# Altium PCB LM399.PcbDoc
Units mil, origin at the board's own origin, x right, y up, seen from the top; angles counter-clockwise.
Board outline 3252 x 1988.19 mil, 4 copper layers (Top Layer, Layer 1, Layer 2, Bottom Layer), stack 62.493 mil thick; 66 components, 27 nets, 222 pads, 268 vias.
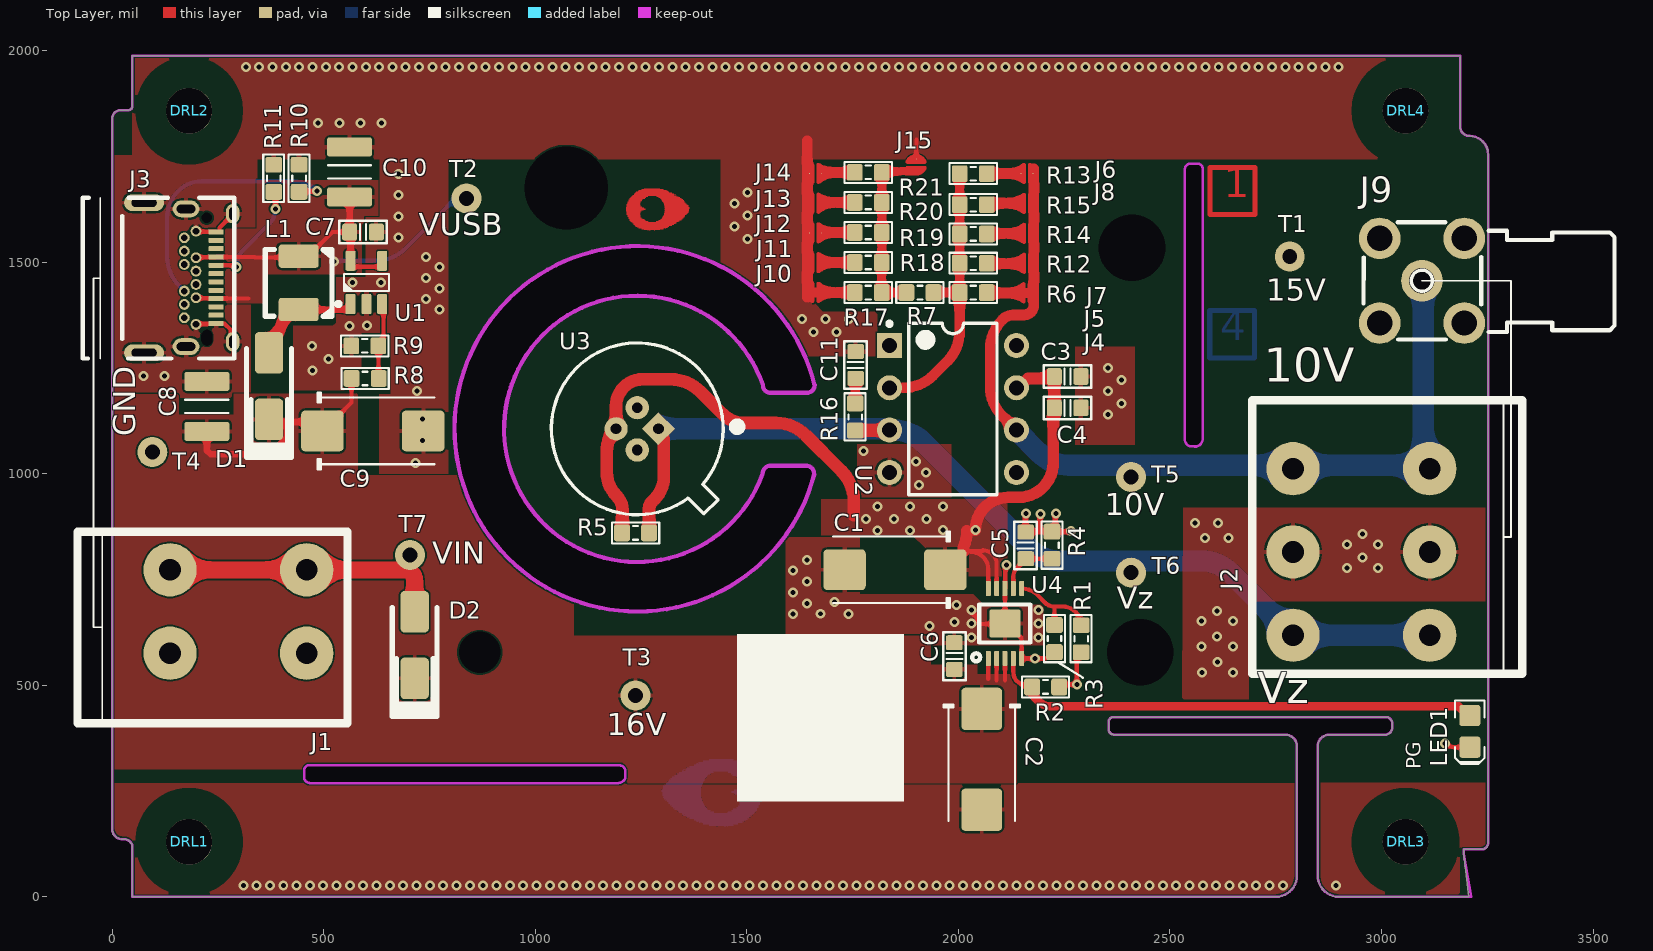
[diagram p0: Top Layer view]
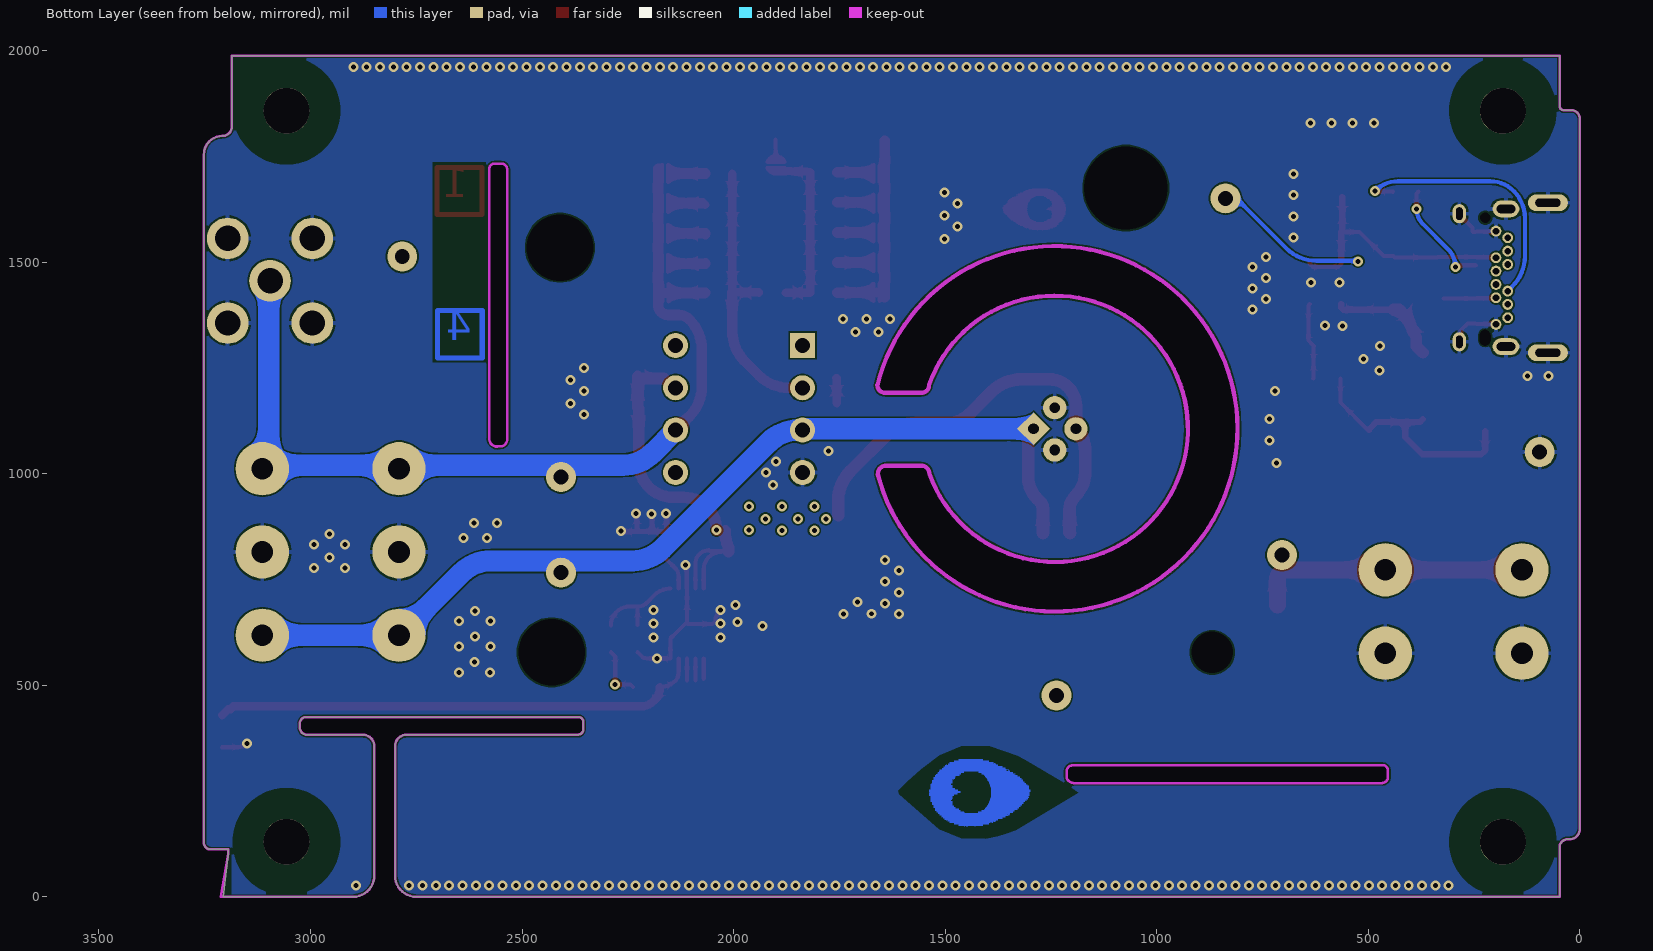
[diagram p1: Bottom Layer view, seen from below]
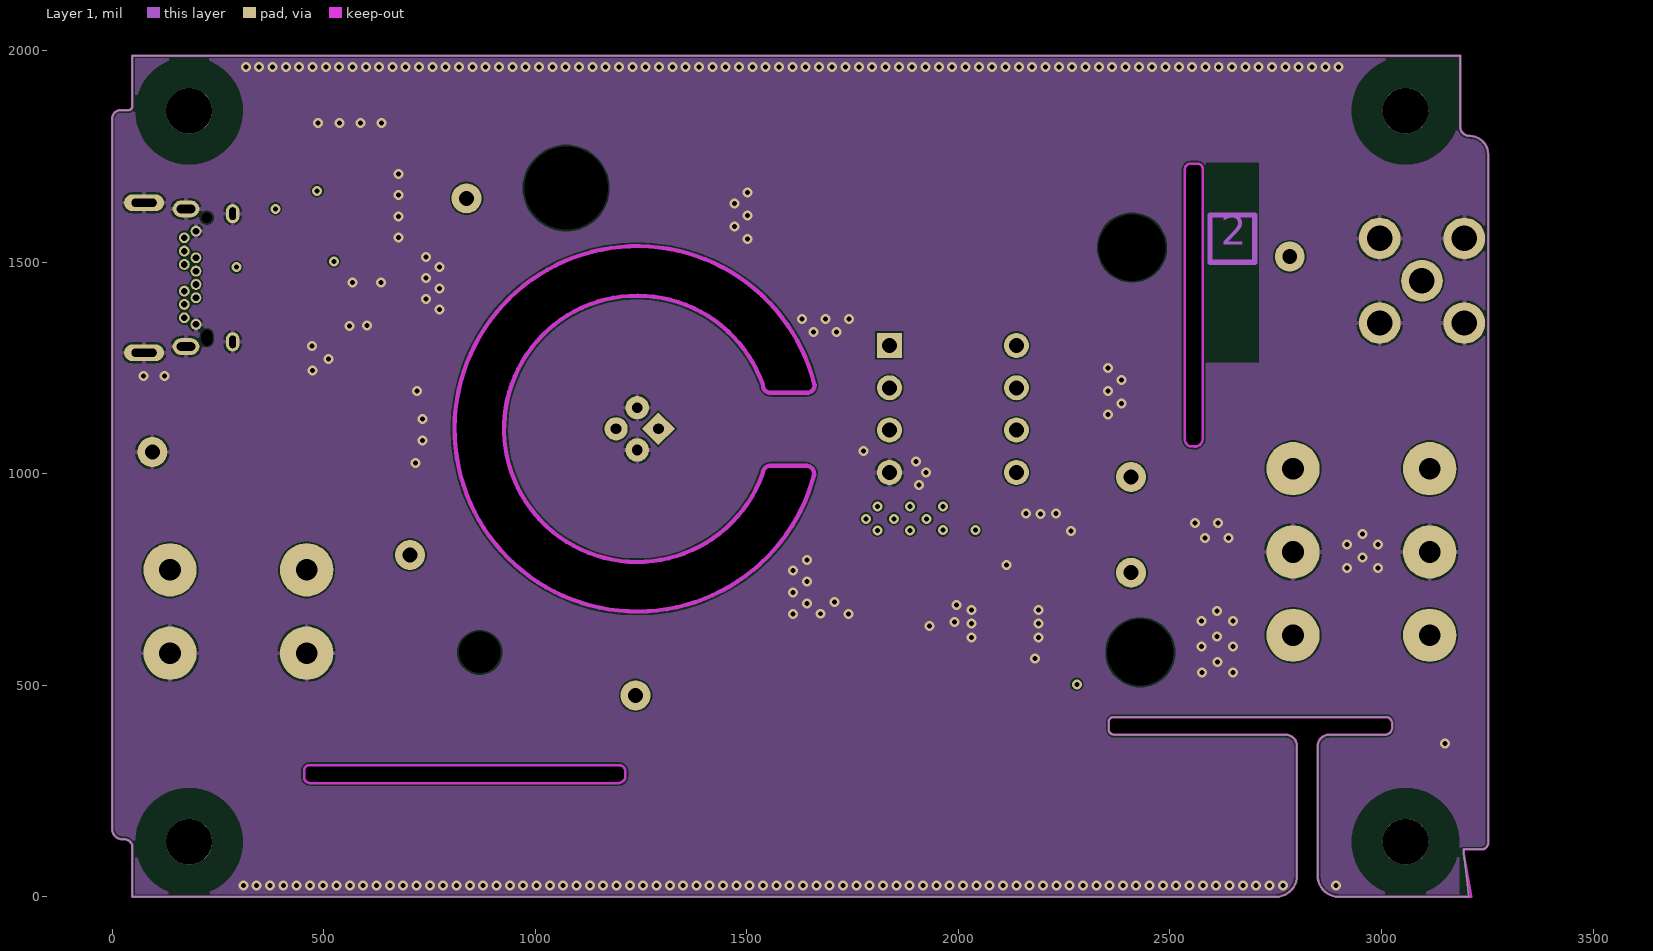
[diagram p2: Layer 1]
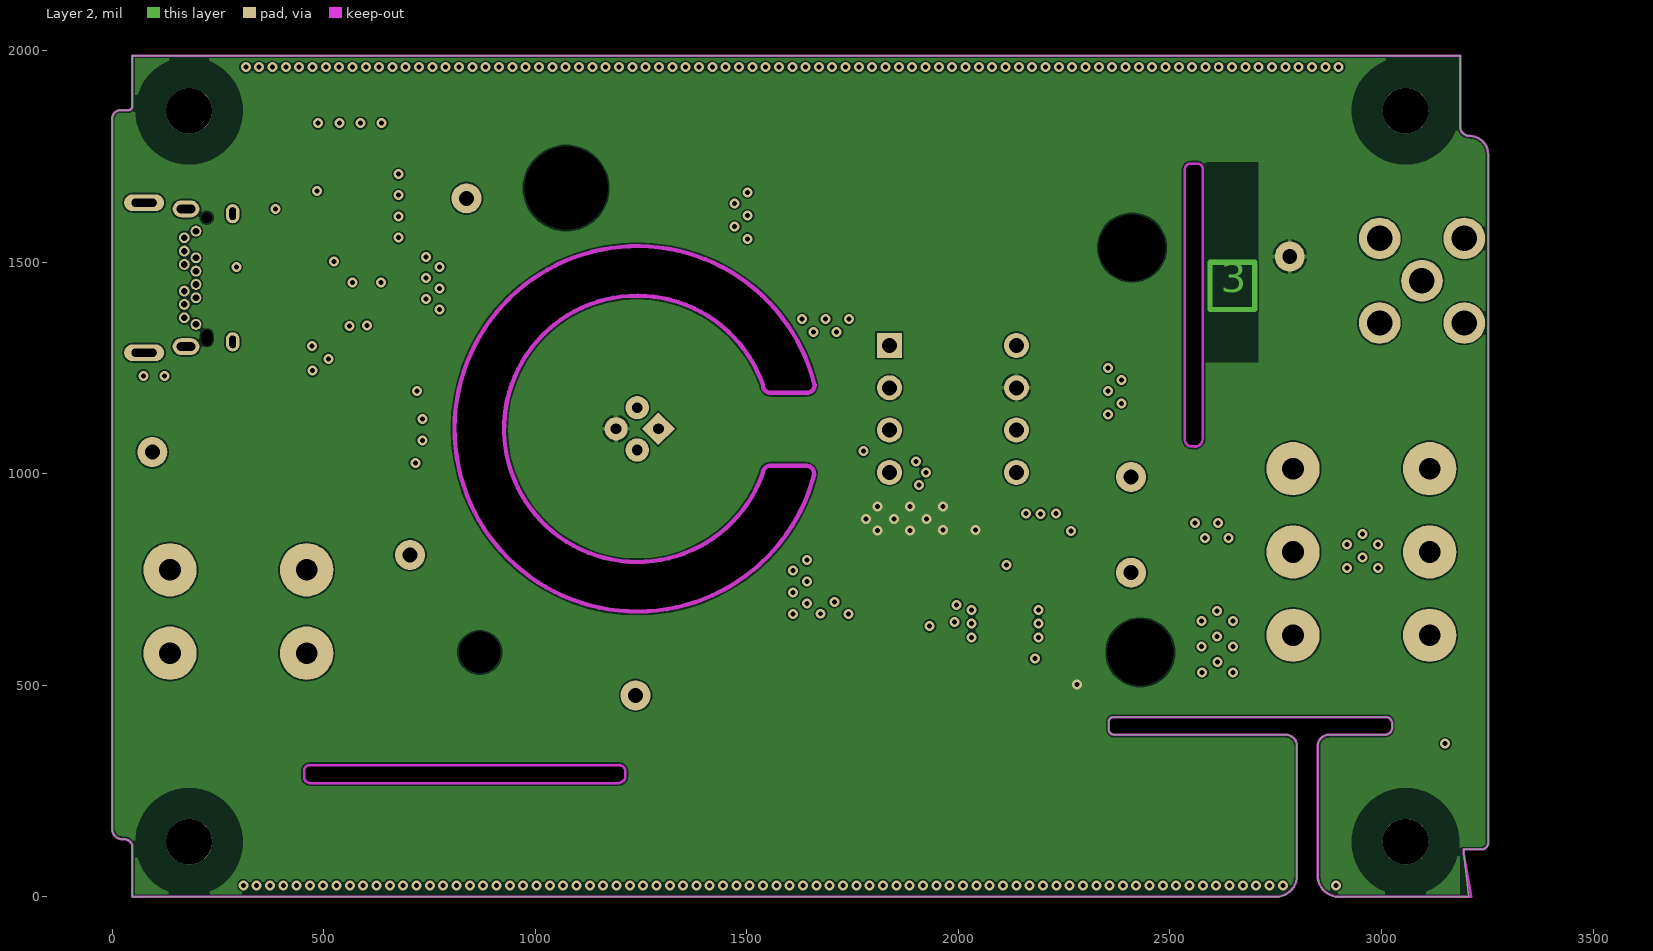
[diagram p3: Layer 2]
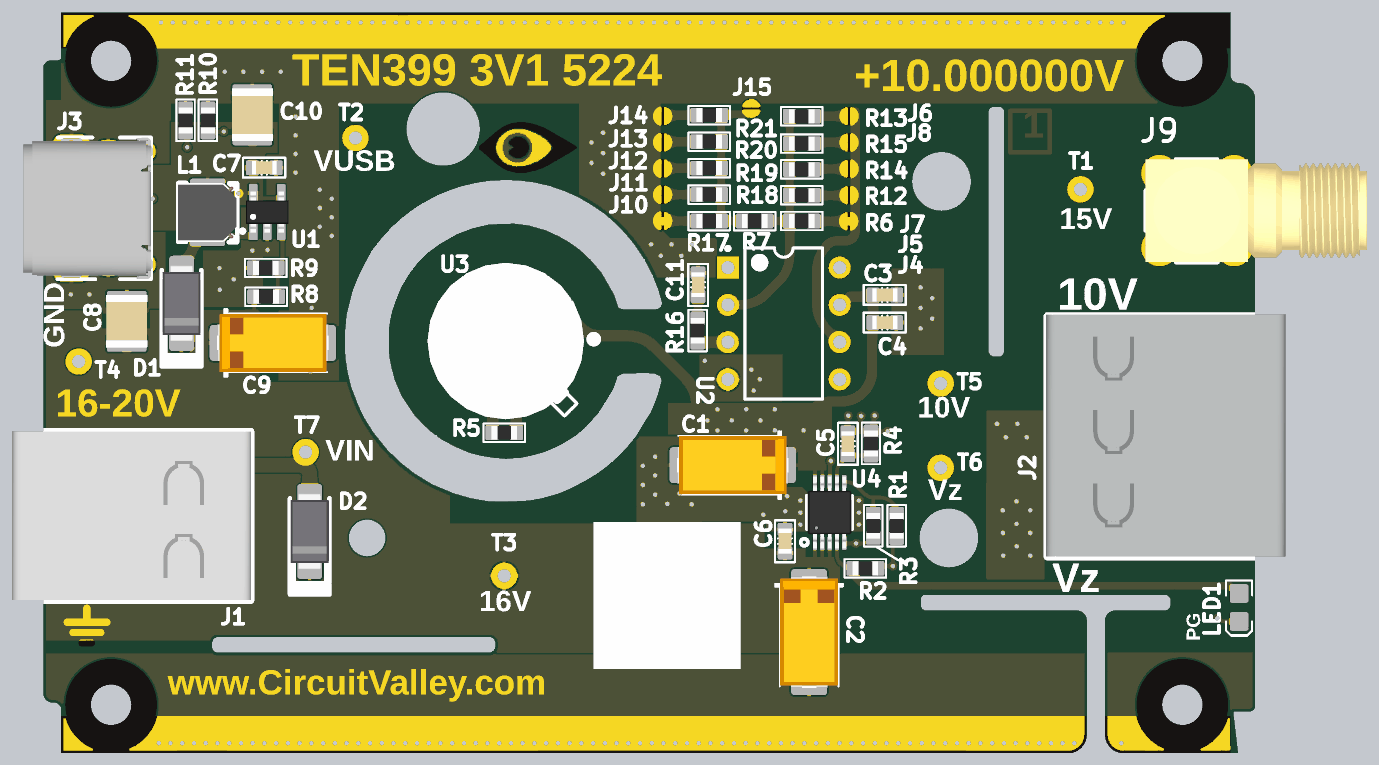
[diagram p4: 3D render of the assembled board from above, using the file's embedded part models]

## Layer stack, top to bottom
Top Solder: solder mask 0.4, Solder Resist, Dk 3.5
Top Layer: signal copper 1.4
Dielectric 2: prepreg 8.2835, PP-006, Dk 4.1
Layer 1: signal copper 0.5984
Dielectric 1: dielectric 41.9291, FR-4, Dk 4.8
Layer 2: signal copper 0.5984
Dielectric 3: prepreg 8.2835, PP-006, Dk 4.1
Bottom Layer: signal copper 1.4
Bottom Solder: solder mask 0.4, Solder Resist, Dk 3.5

## Board outline
25,136 29,136 cw(c29,117) 48,117 48,0 2750,0 ccw(c2750,50) 2800,50 2800,356 ccw(c2773,356) 2773,383 2368.66,383 cw(c2368.66,396.66) 2355,396.66 2355,413.1 cw(c2366.9,413.1) 2366.9,425 3009.93,425 cw(c3009.93,410) 3024.93,410 3024.93,399.93 cw(c3008,399.93) 3008,383 2876,383 ccw(c2876,356) 2849,356 2849,50 ccw(c2899,50) 2899,0 3206,0 3194,102 3194,112 3236,112 ccw(c3236,128) 3252,128 3252,1754 ccw(c3208,1754) 3208,1798 cw(c3208,1820.2) 3185.8,1820.2 3185.8,1988.19 48,1988.19 48,1868.63 cw(c38.37,1868.63) 38.37,1859 20,1859 ccw(c20,1839) 0,1839 0,161 ccw(c25,161)
cut-out: 1556,1191 1641.93,1191 ccw(c1641.93,1209.3) 1660.23,1209.3 1650,1245 1634,1285 1622,1309 1604,1339 1587,1364 1566,1390 1541,1417 1507,1447 1478,1467 1438,1491 1400,1508 1360,1522 1316,1532 1276,1537 1239,1538 1197,1536 1163,1531 1124,1522 1094,1512 1064,1500 1038,1487 1011,1472 986,1455 963,1437 935,1412 906,1380 881,1348 859,1307 844,1276 830,1241 814,1178 810,1134 809,1092 811,1058 817,1020 826,983 846,931 862,898 886,860 923,814 957,781 995,751 1044,721 1102,697 1147,684 1194,676 1226,675 1269,676 1304,678 1338,684 1384,697 1414,710 1451,729 1486,750 1513,770 1545,798 1568,823 1591,851 1613,888 1630,914 1642,943 1650,965 1659.28,998.93 1655,1012 1639.21,1019 1617,1020 1556.53,1019 1541,1012 1537.12,999.6 1530,979 1511,947 1488,911 1454,874 1431,854 1401,835 1379,823 1347,809 1315,800 1283,793 1241,790 1207,793 1176,798 1144,806 1111,820 1070,841 1039,864 1020,882 997,906 978,934 962,958 943,1002 935,1033 929,1063 926,1101 927,1130 930,1156 936,1185 947,1217 961,1251 982,1286 1002,1312 1035,1345 1064,1366 1109,1392 1151,1408 1193,1418 1228,1420 1263,1421 1302,1416 1348,1403 1383,1387 1411,1371 1439,1351 1468,1324 1497,1290 1514,1261 1532,1229 1538.06,1209.77 1543,1195
cut-out: 2536,1081 ccw(c2553,1081) 2553,1064 2563.83,1064 ccw(c2563.83,1077.59) 2577.41,1077.59 ccw(c2576,1079) 2578,1079 2578,1722.1 ccw(c2566.1,1722.1) 2566.1,1734 2549.66,1734 ccw(c2549.66,1720.34) 2536,1720.34
cut-out: 1196.37,312 cw(c1196.37,295.19) 1213.18,295.19 1213.18,288.21 cw(c1194.64,288.21) 1194.64,269.67 1010.1,270 468,270 cw(c468,285) 453,285 453,295.07 cw(c469.93,295.07) 469.93,312

## Design rules (kind name [scope] priority, off if disabled: settings)
Clearance Clearance_GNDT [OnLayer('GND_T')] p1: gap=5 ignorepadtopadclearanceinfootprint=FALSE
Clearance Clearance_INT [OnLayer('Signal_INT')] p2: gap=5 ignorepadtopadclearanceinfootprint=FALSE
Clearance [All] p3: gap=3.62 ignorepadtopadclearanceinfootprint=FALSE
Clearance Clearance_PWR [OnLayer('PWR')] p4: gap=5 ignorepadtopadclearanceinfootprint=FALSE
Clearance Clearance_GNDB [OnLayer('GND_B')] p5: gap=5 ignorepadtopadclearanceinfootprint=FALSE
ComponentClearance [All] p1: gap=10 collisioncheckmode=3 verticalgap=0 showdistances=FALSE
DiffPairsRouting [All] p1: maxlimit=4 minlimit=4 mostfreqgap=4 toplayer_minwidth=4.62 toplayer_maxwidth=10 toplayer_prefwidth=4.62 midlayer1_minwidth=4.62 midlayer1_maxwidth=10 midlayer1_prefwidth=4.62 midlayer2_minwidth=4.62 midlayer2_maxwidth=10 midlayer2_prefwidth=4.62 bottomlayer_minwidth=4.62 bottomlayer_maxwidth=10 bottomlayer_prefwidth=4.62 maxuncoupledlength=500
HoleSize [All] p1: absolutevalues=TRUE maxlimit=196.85 minlimit=1 maxpercent=80.000 minpercent=20.000
MatchedLengths Matched_MIPI_GRP [InNetClass('MIPI')] p1: tolerance=5 checknetsindiffpair=FALSE checkdiffpairvsdiffpair=TRUE checkxsignals=TRUE checkothers=TRUE
MatchedLengths Matched_MIPI [InNetClass('MIPI')] p2: tolerance=5 checknetsindiffpair=TRUE checkdiffpairvsdiffpair=FALSE checkxsignals=FALSE checkothers=FALSE
MatchedLengths Matched_GPIF_GRP [InNetClass('GPIF')] p3: tolerance=50 checknetsindiffpair=FALSE checkdiffpairvsdiffpair=TRUE checkxsignals=TRUE checkothers=TRUE
MatchedLengths Matched_USB3FX_GRP [InNetClass('USB3FX')] p4: tolerance=5 checknetsindiffpair=FALSE checkdiffpairvsdiffpair=TRUE checkxsignals=TRUE checkothers=TRUE
MatchedLengths Match_USB3FX [InNetClass('USB3FX')] p5: tolerance=4 checknetsindiffpair=TRUE checkdiffpairvsdiffpair=FALSE checkxsignals=FALSE checkothers=FALSE
MatchedLengths Matched_USB3_GRP [InNetClass('USB3')] p6: tolerance=10 checknetsindiffpair=FALSE checkdiffpairvsdiffpair=TRUE checkxsignals=TRUE checkothers=TRUE
MatchedLengths Matched_USB2 [InNetClass('USB2')] p7: tolerance=40 checknetsindiffpair=TRUE checkdiffpairvsdiffpair=FALSE checkxsignals=FALSE checkothers=FALSE
MatchedLengths Matched_USB3 [InNetClass('USB3')] p8: tolerance=4 checknetsindiffpair=TRUE checkdiffpairvsdiffpair=FALSE checkxsignals=FALSE checkothers=FALSE
MinimumSolderMaskSliver [All] p1: minsoldermaskwidth=0.02
PlaneClearance [All] p1: clearance=6
PlaneConnect PlaneConnect_1 [All] p1: pad.planeconnectstyle=Relief pad.reliefexpansion=20 pad.reliefentries=4 pad.reliefconductorwidth=10 pad.reliefairgap=5 via.planeconnectstyle=Direct via.reliefexpansion=20 via.reliefentries=4 via.reliefconductorwidth=10 via.reliefairgap=10
PolygonConnect [All] p1: thpad.connectstyle=Relief thpad.reliefconductorwidth=10 thpad.reliefentries=4 thpad.polygonreliefangle="90 Angle" thpad.airgapwidth=5 smdpad.connectstyle=Relief smdpad.reliefconductorwidth=10 smdpad.reliefentries=4 smdpad.polygonreliefangle="90 Angle" smdpad.airgapwidth=5 via.connectstyle=Direct via.reliefconductorwidth=10 via.reliefentries=4 via.polygonreliefangle="90 Angle" via.airgapwidth=10
RoutingVias [All] p1: holewidth=7.87 width=17.72 viastyle="Through Hole" minholewidth=7.87 minwidth=17.72 maxholewidth=248.03 maxwidth=275.59
SilkToSilkClearance [All] p1: silktosilkclearance=0
SilkToSolderMaskClearance [IsPad] p1: minsilkscreentomaskgap=0 clearancetoexposedcopper=TRUE
SolderMaskExpansion [All] p1: expansion=1 istentingtop=FALSE
Width [All] p1: maxlimit=50 minlimit=3.54 preferedwidth=5 midlayer1_minwidth=5 midlayer2_minwidth=5 minimp=50.000000 maximp=50.000000 favimp=50.000000
22 further rules are at their usual default settings.

## Components (designator, comment, footprint, x,y, rotation, side; value= is the part's Value field where it differs from the comment)
C1 "47uf 20V D" CAPMP7343X310N 1850,773 r180 top value="22uf 20V D"
C2 "47uf 20V D" CAPMP7343X310N 2055,325 r270 top value="22uf 20V D"
C3 "approved sub OK" CAPC1608N 2258,1229.62 r0 top value=1uf
C4 "approved sub OK" CAPC1608N 2258,1155.59 r0 top value=100n
C5 "approved sub OK" CAPC1608N 2159,830.5 r90 top value=4.7uf
C6 "approved sub OK" CAPC1608N 1990.37,569 r90 top value=100n
C7 "approved sub OK" CAPC1608N 593,1571 r0 top value=100n
C8 "10µ" CAPC3225N 224,1159 r90 top
C9 "47uf 20V D" CAPMP7343X310N 616,1101 r0 top value="22uf 20V D"
C10 "10µ" CAPC3225N 561,1713 r90 top
C11 "approved sub OK" CAPC1608N 1757,1257 r90 top value=1uf
D1 "SDT5A60SA-13" DO-214AC 371,1207 r270 top
D2 "SDT5A60SA-13" DO-214AC 715,595 r270 top
DRL1 "Mounting" NO_COPPER_NOMASK_2m75_6m2#1 182,130 r0 top
DRL2 "Mounting" NO_COPPER_NOMASK_2m75_6m2#1 182,1857.68 r0 top
DRL3 "Mounting" NO_COPPER_NOMASK_2m75_6m2#2 3017.19,130 r0 top
DRL4 "Mounting" NO_COPPER_NOMASK_2m75_6m2#3 3029,1838 r0 top
J1 "2624-1102" 2624-1102 298.31,674.25 r270 top
J2 "2624-1103" 2624-1103 2952.17,815 r90 top
J3 "USB C Connector" UT11113-11602-7H 92.9,1463 r270 top
J4 "SMD Jumper Bridged" SMD_Jumper_bridge 2161.13,1427.5 r180 top net-tie
J5 "SMD Jumper" SMD_Jumper 2162.07,1497.25 r180 top net-tie
J6 "SMD Jumper" SMD_Jumper 2162.07,1709.49 r180 top net-tie
J7 "SMD Jumper" SMD_Jumper 2162.07,1568 r180 top net-tie
J8 "SMD Jumper" SMD_Jumper 2162.07,1638.75 r180 top net-tie
J9 "SMA" SMA_Connector 3095.39,1455.98 r270 top
J10 "SMD Jumper Bridged" SMD_Jumper_bridge 1662,1428.5 r180 top net-tie
J11 "SMD Jumper" SMD_Jumper 1662,1498.75 r180 top net-tie
J12 "SMD Jumper" SMD_Jumper 1662,1569 r180 top net-tie
J13 "SMD Jumper" SMD_Jumper 1662,1639.24 r180 top net-tie
J14 "SMD Jumper" SMD_Jumper 1662,1709.49 r180 top net-tie
J15 "SMD Jumper" SMD_Jumper 1900.05,1729.86 r90 top net-tie
L1 "10uh" FDSD0420-H-2R2M 441,1451.12 r270 top value=FDSD0420D-100M=P3
LED1 "" LED-0805-K 3208.65,391.1 r270 top
R1 "RES_NL_0603" RESC1608N 2290,610 r90 top value=150K
R2 "RES_NL_0603" RESC1608N 2206,496 r180 top value=5K1
R3 "RES_NL_0603" RESC1608N 2227,610.3 r270 top value=3K3
R4 "RES_NL_0603" RESC1608N 2221,831 r90 top value=150K
R5 "RES_NL_0603" RESC1608N 1236.99,860 r0 top value=2K67
R6 "RES_NL_0603" RESC1608N 2035,1428 r0 top value=9K65
R7 "RES_NL_0603" RESC1608N 1908.99,1428 r180 top value=20K
R8 "RES_NL_0603" RESC1608N 597.99,1225 r180 top value=59K
R9 "RES_NL_0603" RESC1608N 596.99,1302 r0 top value=5K1
R10 "RES_NL_0603" RESC1608N 441.88,1698 r90 top value=5K1
R11 "RES_NL_0603" RESC1608N 382,1698 r90 top value=5K1
R12 "RES_NL_0603" RESC1608N 2035,1497.25 r0 top value=198K
R13 "RES_NL_0603" RESC1608N 2035,1709 r0 top value=110K
R14 "RES_NL_0603" RESC1608N 2035,1566.5 r0 top value=68K
R15 "RES_NL_0603" RESC1608N 2035,1635.75 r0 top value=40K2
R16 "RES_NL_0603" RESC1608N 1756,1134 r90 top value=5R1
R17 "RES_NL_0603" RESC1608N 1787,1428 r180 top value=1K
R18 "RES_NL_0603" RESC1608N 1787,1499 r180 top value=7K5
R19 "RES_NL_0603" RESC1608N 1787,1570 r180 top value=3K3
R20 "RES_NL_0603" RESC1608N 1787,1641 r180 top value=1K
R21 "RES_NL_0603" RESC1608N 1787,1712 r180 top value=340R
T1 "TestHook" Test_PAD_0851-0-15-20-82-14-11-0 2783,1513 r0 top
T2 "TestHook" Test_PAD_0851-0-15-20-82-14-11-0 837.65,1650.76 r0 top
T3 "TestHook" Test_PAD_0851-0-15-20-82-14-11-0 1237,476 r0 top
T4 "TestHook" Test_PAD_0851-0-15-20-82-14-11-0 95,1051 r0 top
T5 "TestHook" Test_PAD_0851-0-15-20-82-14-11-0 2408,992 r0 top
T6 "TestHook" Test_PAD_0851-0-15-20-82-14-11-0 2408,766 r0 top
T7 "TestHook" Test_PAD_0851-0-15-20-82-14-11-0 704,808 r0 top
U1 "LT1615ES5/AP3012" SOT23-5 601,1452 r90 top
U2 "LT1001ACN8" N8 1987,1153 r0 top
U3 "LM399" TO-46 1241,1106 r180 top
U4 "LT3042" MSOP10 2110,646 r0 top

## Footprints (in the part's own frame and the unit in brackets; to place one, negate y for a bottom-side part, rotate by r counter-clockwise, add the part's x,y. Pads: shape width x height; smd on the part's side, far side on the other; paste and mask are expansions set on the pad)
2624-1102 [mm] "Foxconn USB connector"
  round 3.2 hole 1.3: 1(-2.5,4.1) 1(-2.5,-4.1) 2(2.5,4.1) 2(2.5,-4.1)
  silkscreen extent -4.8,-9.65 6.7,6.55, body extent -4.8,-9.7 6.7,6.6, height 15.46
2624-1103 [mm] "wago"
  round 3.2 hole 1.3: 1(-5,-4.1) 1(-5,4.1) 2(0,4.1) 2(0,-4.1) 3(5,-4.1) 3(5,4.1)
  silkscreen extent -7.3,-9.65 9.09,6.55, body extent -7.3,-9.66 9.2,6.64, height 15.46
CAPC1608N [mm] "Chip Capacitor, Body 1.6x0.8mm, 0603, IPC Medium Density"
  round 0.254 on Mech14: 0(0,0)
  rrect25% 0.9x1 smd: 1(-0.8,0) 2(0.8,0)
  silkscreen extent -1.44,-0.67 1.42,0.68, body extent -0.85,-0.45 0.85,0.45, height 0.89
CAPC3225N [mm] "Chip Capacitor, Body 3.2x2.5mm, 1210, IPC Medium Density"
  round 0.508 on Mech14: 0(0,0)
  rrect25% 1.15x2.7 smd: 1(-1.5,0) 2(1.5,0)
  silkscreen extent -0.4,-1.3 0.4,1.3, body extent -1.8,-1.4 1.8,1.4, height 2.19
CAPMP7343X310N [mm] "Molded body capacitor, Body 7.3x4.3mm, 2917, IPC Nominal settings"
  round 1 on Mech14: 0(0,0)
  rrect20% 2.55x2.45 smd: 1(-3.025,0) 2(3.025,0)
  silkscreen extent -3.3,-2.3 3.7,2.3, body extent -3.8,-1.97 3.8,1.98, height 3.1
DO-214AC [mm] "SDT5A50SA-13 SDT5A60SA-13"
  rrect30% 2.5x1.7 smd: 1(-2,0) 2(2,0)
  silkscreen extent -2.26,-1.35 4.29,1.35, body extent -2.6,-1.3 2.6,1.3, height 2.42
FDSD0420-H-2R2M [mm] "Murata"
  rrect25% 1.4x2.4 smd: 1(-1.6,0) 2(1.6,0)
  silkscreen extent -2.01,-2.01 2.03,2.01, body extent -1.99,-2.03 2.01,1.97, height 2.01
LED-0805-K [mil]
  round 20 on Mech14: 0(0,0)
  rrect25% 50x50 smd: A(-37.5,0) K(37.5,0)
  Top Layer pour cut-out: -15,30 15,30 15,-30 -15,-30
  silkscreen extent -72,-35 77,35, body extent -39,-25 39,25, height 31
MSOP10 [mm] "LT3042"
  rrect35% 0.3x0.9 smd: 1(-1,-2.1) 2(-0.5,-2.1) 3(0,-2.1) 4(0.5,-2.1) 5(1,-2.1) 6(1,2.1) 7(0.5,2.1) 8(0,2.1) 9(-0.5,2.1) 10(-1,2.1)
  rrect15% 1.88x1.68 smd: 11(0,0)
  silkscreen extent -1.97,-2.27 1.52,1.14, body extent -1.5,-2.45 1.5,2.45, height 1.16
N8 [mm] "DIP, 8-Leads, Row Spacing 7.62mm, Pitch 2.54mm, Body 9.78x6.48mm"
  rect 1.5x1.5 hole 0.9: 1(-3.81,3.81)
  round 1.5 hole 0.9: 2(-3.81,1.27) 3(-3.81,-1.27) 4(-3.81,-3.81) 5(3.81,-3.81) 6(3.81,-1.27) 7(3.81,1.27) 8(3.81,3.81)
  silkscreen extent -3.93,-5.15 2.65,5.23, body extent -3.6,-5.15 3.6,5.15, height 4.45
NO_COPPER_NOMASK_2m75_6m2#1 [mm]
  round 6.3 on Keep-Out: 0(0,0)
  round 2.75 hole 2.75 unplated mask+1.75: D2m7(0,0)
NO_COPPER_NOMASK_2m75_6m2#2 [mm]
  round 6.3 on Keep-Out: 0(1,0)
  round 2.75 hole 2.75 unplated mask+1.75: D2m7(1,0)
NO_COPPER_NOMASK_2m75_6m2#3 [mm]
  round 2.75 hole 2.75 unplated mask+1.75: ""(0.7,0.5)
  round 6.3 on Keep-Out: ""(0.7,0.5)
RESC1608N [mm] "Chip Resistor, Body 1.6x0.8mm, 0603, IPC Medium Density"
  round 0.254 on Mech14: 0(0,0)
  rrect25% 0.95x1 smd: 1(-0.813,0) 2(0.813,0)
  silkscreen extent -1.41,-0.63 1.42,0.63, body extent -0.87,-0.47 0.88,0.48, height 0.54
SMA_Connector [mm] "SMA Right Angle"
  round 2.5 hole 1.524: 1(0,0) 2(-2.54,2.54) 2(-2.54,-2.54) 2(2.54,-2.54) 2(2.54,2.54)
  silkscreen extent -3.51,-3.5 3.53,11.56, body extent -3.5,-3.5 3.5,11.6, height 9.87
SMD_Jumper [mil]
  round 1 smd paste-100: 1(-14,0) 2(14,0)
  Top Layer region: -3.09,-19.25 -3.09,20.46 -3.39,21.96 -4.24,23.24 -4.24,23.24 -5.55,24.11 -7.1,24.42 -7.1,24.42 -7.4,24.42 -8.07,24.31 -9.76,23.64 -11.49,22.76 -13.09,21.81 -14.93,20.49 -16.35,19.3 -17.4,18.3 -18.7,16.89 -19.32,16.11 -20.5,14.51 -21,13.73 -21.43,13.01 -22.01,11.95 -22.58,10.79 -22.98,9.83 -23.47,8.57 -23.77,7.62 -24,6.85 -24.16,6.22 -24.48,4.74 -24.61,3.91 -24.69,3.36 -24.76,2.88 -24.8,2.4 -24.85,1.71 -24.9,0.92 -24.92,-0.08 -24.9,-0.97 -24.84,-2.01 -24.74,-2.99 -24.58,-4.18 -24.39,-5.16 -24.21,-5.99 -24.03,-6.71 -23.78,-7.6 -23.54,-8.34 -23.04,-9.71 -22.56,-10.82 -21.85,-12.27 -20.93,-13.83 -20.43,-14.59 -19.89,-15.37 -19.33,-16.09 -18.36,-17.28 -17.65,-18.03 -16.91,-18.77 -16.15,-19.48 -15.52,-20.01 -14.98,-20.45 -14.23,-21.01 -13.66,-21.41 -13.01,-21.84 -12.54,-22.14 -12.12,-22.39 -11.71,-22.63 -11.35,-22.83 -10.21,-23.41 -9.1,-23.92 -8.49,-24.17 -8.17,-24.27 -7.91,-24.33 -7.62,-24.39 -7.37,-24.41 -7.2,-24.42 -6.96,-24.42 -6.69,-24.4 -6.44,-24.37 -6.2,-24.33 -5.83,-24.22 -5.57,-24.12 -5.41,-24.05 -5.22,-23.96 -5,-23.84 -4.81,-23.71 -4.66,-23.6 -4.52,-23.49 -4.39,-23.37 -4.29,-23.28 -4.2,-23.19 -4.09,-23.07 -3.95,-22.9 -3.85,-22.78 -3.76,-22.64 -3.67,-22.49 -3.58,-22.35 -3.5,-22.19 -3.4,-21.99 -3.34,-21.83 -3.28,-21.68 -3.22,-21.43 -3.17,-21.26 -3.13,-21.04 -3.1,-20.78 -3.09,-20.61 -3.08,-20.52
  Top Layer region: 3.09,19.25 3.09,-20.46 3.39,-21.96 4.24,-23.24 4.24,-23.24 5.55,-24.11 7.1,-24.42 7.1,-24.42 7.4,-24.42 8.07,-24.31 9.76,-23.64 11.49,-22.76 13.09,-21.81 14.93,-20.49 16.35,-19.3 17.4,-18.3 18.7,-16.89 19.32,-16.11 20.5,-14.51 21,-13.73 21.43,-13.01 22.01,-11.95 22.58,-10.79 22.98,-9.83 23.47,-8.57 23.77,-7.62 24,-6.85 24.16,-6.22 24.48,-4.74 24.61,-3.91 24.69,-3.36 24.76,-2.88 24.8,-2.4 24.85,-1.71 24.9,-0.92 24.92,0.08 24.9,0.97 24.84,2.01 24.74,2.99 24.58,4.18 24.39,5.16 24.21,5.99 24.03,6.71 23.78,7.6 23.54,8.34 23.04,9.71 22.56,10.82 21.85,12.27 20.93,13.83 20.43,14.59 19.89,15.37 19.33,16.09 18.36,17.28 17.65,18.03 16.91,18.77 16.15,19.48 15.52,20.01 14.98,20.45 14.23,21.01 13.66,21.41 13.01,21.84 12.54,22.14 12.12,22.39 11.71,22.63 11.35,22.83 10.21,23.41 9.1,23.92 8.49,24.17 8.17,24.27 7.91,24.33 7.62,24.39 7.37,24.41 7.2,24.42 6.96,24.42 6.69,24.4 6.44,24.37 6.2,24.33 5.83,24.22 5.57,24.12 5.41,24.05 5.22,23.96 5,23.84 4.81,23.71 4.66,23.6 4.52,23.49 4.39,23.37 4.29,23.28 4.2,23.19 4.09,23.07 3.95,22.9 3.85,22.78 3.76,22.64 3.67,22.49 3.58,22.35 3.5,22.19 3.4,21.99 3.34,21.83 3.28,21.68 3.22,21.43 3.17,21.26 3.13,21.04 3.1,20.78 3.09,20.61 3.08,20.52
SMD_Jumper_bridge [mil]
  round 1 smd paste-200: 1(-14,0) 2(14,0)
  Top Layer region: -15.73,-11 10,-11 10,11.99 -15.73,11.99
  Top Layer region: -3.06,14.1 -3.06,20.36 -3.37,21.92 -4.25,23.24 -5.57,24.12 -7.12,24.43 -7.12,24.43 -7.91,24.36 -8.93,24.03 -10.15,23.46 -12.24,22.35 -13.71,21.4 -15.5,20.08 -16.33,19.34 -17.48,18.24 -18.29,17.36 -19.04,16.51 -19.74,15.6 -20.48,14.55 -21.08,13.62 -21.42,13.04 -21.77,12.41 -22.01,11.97 -22.28,11.45 -22.72,10.51 -23.05,9.73 -23.36,8.92 -23.61,8.18 -23.83,7.49 -23.94,7.09 -24.09,6.52 -24.19,6.11 -24.5,4.7 -24.6,4.08 -24.73,3.25 -24.78,2.78 -24.83,2.24 -24.87,1.74 -24.91,1.12 -24.94,0.64 -24.93,0.12 -24.93,-0.28 -24.92,-0.7 -24.9,-1.08 -24.88,-1.52 -24.85,-2 -24.82,-2.36 -24.76,-2.96 -24.69,-3.47 -24.6,-4.08 -24.45,-4.94 -24.15,-6.31 -23.98,-6.95 -23.77,-7.68 -23.5,-8.5 -23.03,-9.77 -22.36,-11.27 -21.63,-12.73 -20.69,-14.27 -19.76,-15.6 -18.33,-17.28 -16.8,-18.92 -14.99,-20.45 -14.21,-21.04 -13.46,-21.55 -12.29,-22.31 -11.19,-22.93 -10.4,-23.34 -9.54,-23.74 -8.7,-24.1 -8.24,-24.26 -7.94,-24.34 -7.65,-24.4 -7.36,-24.42 -6.89,-24.43 -5.45,-24.14 -4.22,-23.32 -3.41,-22.1 -3.12,-20.65 -3.12,-20.65 -3.12,-19.49
  Top Layer region: 3.06,-14.1 3.06,-20.36 3.37,-21.92 4.25,-23.24 5.57,-24.12 7.12,-24.43 7.12,-24.43 7.91,-24.36 8.93,-24.03 10.15,-23.46 12.24,-22.35 13.71,-21.4 15.5,-20.08 16.33,-19.34 17.48,-18.24 18.29,-17.36 19.04,-16.51 19.74,-15.6 20.48,-14.55 21.08,-13.62 21.42,-13.04 21.77,-12.41 22.01,-11.97 22.28,-11.45 22.72,-10.51 23.05,-9.73 23.36,-8.92 23.61,-8.18 23.83,-7.49 23.94,-7.09 24.09,-6.52 24.19,-6.11 24.5,-4.7 24.6,-4.08 24.73,-3.25 24.78,-2.78 24.83,-2.24 24.87,-1.74 24.91,-1.12 24.94,-0.64 24.93,-0.12 24.93,0.28 24.92,0.7 24.9,1.08 24.88,1.52 24.85,2 24.82,2.36 24.76,2.96 24.69,3.47 24.6,4.08 24.45,4.94 24.15,6.31 23.98,6.95 23.77,7.68 23.5,8.5 23.03,9.77 22.36,11.27 21.63,12.73 20.69,14.27 19.76,15.6 18.33,17.28 16.8,18.92 14.99,20.45 14.21,21.04 13.46,21.55 12.29,22.31 11.19,22.93 10.4,23.34 9.54,23.74 8.7,24.1 8.24,24.26 7.94,24.34 7.65,24.4 7.36,24.42 6.89,24.43 5.45,24.14 4.22,23.32 3.41,22.1 3.12,20.65 3.12,20.65 3.12,19.49
SOT23-5 [mm]
  round 0.5 on Mech14: 0(0,0)
  rrect25% 1.2x0.6 smd: 1(-1.3,0.95) 2(-1.3,0) 3(-1.3,-0.95) 4(1.3,-0.95) 5(1.3,0.95)
  silkscreen extent -1.42,-1.35 0.51,1.81, body extent -1.4,-1.45 1.4,1.45, height 1.44
Test_PAD_0851-0-15-20-82-14-11-0 [mm]
  round 1.8 hole 0.9: 1(0,0)
TO-46 [mm] "LM399"
  rect 1.4x1.4 hole 0.65 rot 45: 1(-1.27,0)
  round 1.4 hole 0.65: 2(0,-1.27) 3(1.27,0) 4(0,1.27)
  silkscreen extent -6.24,-5.16 5.16,5.16, body extent -7.72,-7.54 7.54,7.72, height 8.94
UT11113-11602-7H [mm] "Foxconn USB connector"
  oval 1x2.4 hole 0.5 slot 1.5 at 90 deg: 0(-4.5,-0.438) 0(4.5,-0.438)
  oval 1x1.6 hole 0.5 slot 1.1 at 90 deg: 0(-4.13,2.077) 0(4.13,2.077)
  oval 1.15x0.8 hole 0.4 slot 0.75 at 0 deg: 0(-3.845,4.877) 0(3.845,4.877)
  round 0.1 hole 0.65 unplated: 1(-3.6,3.327)
  round 0.1 hole 0.65 slot 0.95 at 0 deg unplated: 1(3.6,3.327)
  rrect20% 0.3x0.9 smd: A1(-2.75,3.887) A2(-2.25,3.887) A3(-1.75,3.887) A4(-1.25,3.887) A5(-0.75,3.887) A6(-0.25,3.887) A7(0.25,3.887) A8(0.75,3.887) A9(1.25,3.887) A10(1.75,3.887) A11(2.25,3.887) A12(2.75,3.887)
  round 0.65 hole 0.4: B1(2.8,2.677) B2(2.4,1.977) B3(1.6,1.977) B4(1.2,2.677) B5(0.8,1.977) B6(0.4,2.677) B7(-0.4,2.677) B8(-0.8,1.977) B9(-1.2,2.677) B10(-1.6,1.977) B11(-2.4,1.977) B12(-2.8,2.677)
  silkscreen extent -4.8,-4.12 4.85,4.98, body extent -4.8,-3.71 4.85,4.99, height 3.19

## Part data
C1 C2 C9: library part CAPT_330u_2917_6V3, "Capacitor SMD Tant 330uF 20% 6V3 2917", ESR (Equivalent Series Resistance)="15 mOhm", Manufacturer Part Number=T520D337M006ATE015, Manufacturer Size Code=D, Operating Temperature="-55°C ~ 125°C", Package / Case="2917 (7343 Metric)", Ratings=6.3V, Supplier Part Number 1=399-4052-1-ND, Tolerance=±20%, ComponentLink1Description="T520D Datasheet", ComponentLink1URL=http://www.kemet.com/datasheets&T520D337M006ATE015, Height - Seated (Max)="0.122\" (3.10mm)", Material="Solid Tantalum", Part=TCJY226M025R0070, Size / Dimension="0.287\" L x 0.169\" W (7.30mm x 4.30mm)", Supplier 1=Digi-Key
C3 C4 C5 C6 C7 C11: library part CAPC_1n_0603_100V, "Capacitor SMD Cer 1nF 10% 100V X7R 0603", Manufacturer 1="Murata Electronics North America", Manufacturer Part Number 1=GCM188R72A102KA37D, Operating Temperature="-55°C ~ 125°C", Package / Case="0603 (1608 metric)", Ratings="100V; X7R", Supplier Part Number 1=490-4780-1-ND, Tolerance=±10%, ComponentLink1Description=http://search.murata.co.jp/Ceramy/image/img/PDF/ENG/GCM188R72A102KA37.pdf, ComponentLink1URL=http://search.murata.co.jp/Ceramy/image/img/PDF/ENG/GCM188R72A102KA37.pdf, Material=ceramic, Size / Dimension="0.063\" L x 0.031\" W (1.60mm x 0.80mm)", Supplier 1=Digi-Key, Thickness (Max)="0.035\" (0.90mm)"
C8 C10: library part CAPC_10u_1210_50V, "Capacitor SMD Cer 10uF 20% 16V X5R 1210", Manufacturer 1="Taiyo Yuden", Manufacturer Part Number 1=UMK325BJ106MM-T, Package / Case="1210 (3225 Metric)", Ratings="50V; X5R", Supplier Part Number 1=587-2225-1-ND, Tolerance=±20%, Material=ceramic, Size / Dimension="0.126\" L x 0.098\" W (3.20mm x 2.50mm)", Supplier 1=Digi-Key
D1 D2: library part Schottky_diode
DRL1 DRL2 DRL3 DRL4: library part Mountinghole, "Mounting Hole"
J3: library part USB_C, "USB C connector"
J4 J10: library part SMD_Jumper_Bridged, "SMD Jumper"
J5 J6 J7 J8 J11 J12 J13 J14 J15: library part SMD_Jumper
J9: library part "SMA Connector"
L1: library part inductor_smd
LED1: library part LED_SMD_Green_0805, "LED, 0805 SMD, Green", Manufacturer 1=Ligitek, Manufacturer Part Number 1=LG170G-CT, Package / Case=0805, Ratings="10 mcd; 573 nm", Material=GaP
R1 R2 R3 R4 R5 R6 R7 R8 R9 R10 R11 R12 R13 R14 R15 R16 R17 R18 R19 R20 R21: "Resistor, SMD chip", Manufacturer 1="Royal Ohm", Package / Case="0603 (1608 metric)", Ratings="1/10 W", Tolerance=±5%
U1: library part AP3012, "Boost Conveter"
U2: "General Purpose, High Precision Op Amp", ComponentLink1Description="Manufacturer Link", ComponentLink1URL=http://www.linear.com/, ComponentLink2Description=Datasheet, ComponentLink2URL=http://www.linear.com/pc/downloadDocument.do?navId=H0,C1,C1154,C1009,C1021,P1206,D1672, DatasheetVersion=1990, LatestRevisionDate=29-May-2009, LatestRevisionNote="Component Body Added.", Note="Pin 5 is NC (not internally connected) pin.", PackageDescription="DIP, Plastic, 8-Pin, Row Spacing 7.62 mm, Pitch 2.54 mm", PackageReference=N8, PackageVersion="N8 1002", Published=8-Jun-2000, Publisher="Altium Limited"
U4: "Low noise Linear Regulator"
U3: Part=LM399

## Free pads (board coordinates)
  round 0 hole 98.43 unplated: M4(869,577.68)
  round 0 hole 196.85 unplated: M4(1073,1675)
  round 0 hole 157.48 unplated: M4(2410.32,1534.34) M4(2430,577.68)

## Via types
v1: diameter 23.62, hole 11.81, Top Layer to Bottom Layer, 265 vias
v2: diameter 23.62, hole 11.81, Top Layer to Bottom Layer, tented top, 3 vias

## Nets (pads, with @x,y where several pads share a name; then routed paths per layer and width w, separated by ;. In a path a pad name is that pad's centre, name@x,y a point inside that pad or via, vN(x,y) a via of type N, cw(c..) or ccw(c..) an arc to the next point about the centre after c; other vN are vias at no path point)
15V: C1.1 C3.1 C4.1 R1.1 R2.1 R5.1 T1.1 U2.7 U3.3 U4.9 U4.10 | length 2086.9
  Top Layer w10: 2020,817.58 2057.29,817.58 ; 2028.94,815.28 cw(c2028.94,773.59) 2070.63,773.59 U4.10 ; 2058,819 cw(c2058,786.69) 2090.31,786.69 U4.9 ; R2.1 2244.01,502 v1(2279.7,502) 2279.7,567.69 R1.1
  Top Layer w27.56: C1.1@2011.83,815.74 2011.83,825.75 ccw(c1920,865.33) 2020,865.33 ; v1(2040.09,866.39) cw(c2117.7,866.39) 2066.8,924.97 cw(c2117.7,866.39) 2117.7,944 2142,944 ccw(c2142,1026) 2224,1026 2224,1153.08 cw(c2226.5,1153.08) C4.1 C3.1@2226.5,1228.86 ; U2.7 2142.52,1203 2164.45,1224.93 2222.57,1224.93 C3.1@2226.5,1228.86 ; C3.1 C3.1@2226.5,1228.86
  Top Layer w30: R5.1 ccw(c1202.53,862.45) 1206,862.45 1206,914.2 ccw(c1158.2,914.2) 1192,948 cw(c1247.53,1003.53) 1169,1003.53 1169,1052.89 cw(c1244.11,1052.89) U3.3 1191,1160 cw(c1254,1160) 1254,1223 1319.58,1223 cw(c1319.58,1123) 1390.29,1193.71 1444,1140 ccw(c1492.28,1188.28) 1492.28,1120 1568.58,1120 cw(c1568.58,1020) 1639.29,1090.71 1723.71,1006.29 cw(c1653,935.58) 1753,935.58 1753,902
  other v1: 1809.06,866 1886.07,866 1963.08,866.39 1782,893 1847.57,893 1924.58,893 1809.06,922.89 1886.07,922.89 1963.08,922.89
16V: C2.1 C6.1 C8.1 C9.1 D1.2 D2.2 R8.2 T3.1 U4.1 U4.2 U4.3 | length 729.9
  Top Layer w10: C9.1 498.87,1101 565.98,1168.11 R8.2 ; 2070.63,515.37 U4.1 ; 2090.32,512 U4.2 ; 2110,512 U4.3
  Top Layer w15: C8.1 224,1054.81 232.86,1045.94 372.83,1045.94 412.87,1085.99 412.87,1122.26 ; D1.2 377,1122.26 412.87,1122.26 ; C9.1@496.91,1106.26 480.91,1122.26 412.87,1122.26
GND: C1.2 C2.2 C3.2 C4.2 C5.2 C6.2 C7.2 C8.2 C9.2 C10.2 C11.2 J1.2 J2.2 J3.0 J3.A1 J3.A12 J3.B1 J3.B12 J9.2 J10.2 J11.2 J12.2 J13.2 J14.2 J15.2 LED1.K R3.2 R4.2 R9.1 R10.2 R11.2 T4.1 U1.2 U2.4 U3.2 U3.4 U4.5 U4.8 U4.11 | length 1367.9
  Top Layer w10: J3.B1 199.37,1353.83 245.04,1353.83 J3.A12 265.91,1354.73 265.91,1354.26 280.79,1339.37 280.79,1315.74 J3.0@284.91,1311.62 ; J3.B12 199.37,1572.17 245.04,1572.17 J3.A1 252.76,1571.27 253.66,1572.17 253.66,1581.24 284.91,1612.49 J3.0@284.91,1614.38 ; J15.2@1900,1744 1901,1789 ; v1@2031.41,675.03 2031.41,671.34 2042.62,660.14 2042.62,652.07 2049.69,645 2109,645 U4.11 U4.8 2110.91,729.58 2110.91,781.69 v1(2113.43,784.22) ; U4.11@2113.94,646 2149.37,610.57 U4.5 2149.69,563 v1(2181,563) 2206.46,563 2208.05,564.59 2213.3,564.59 R3.2 ; v1(3150.03,362.12) ccw(c3170.55,382.64) 3170.55,353.62 LED1.K
  Top Layer w11.81: C5.2@2158.33,862.62 2158.33,904.22 v1(2159.88,905.77) ; C5.2 cw(c2161.46,859.53) 2161.46,863.01 2192.58,863.01 ; v1(2194.55,904.74) 2192.58,902.76 2192.58,863.01 ; v1(2230.89,906) 2228.63,903.7 2228.63,870.64 R4.2 ; v1(2266,864) cw(c2263.61,866.39) 2263.61,863.01 R4.2 ; 2192.58,863.01 R4.2
  Top Layer w25: 1642.64,1416.45 1642.64,1787
  other v1: 310,27 341.5,27 372.99,27 404.49,27 435.98,27 467.48,27 498.98,27 530.47,27 561.97,27 593.46,27 624.96,27 656.46,27 687.95,27 719.45,27 750.94,27 782.44,27 813.94,27 845.43,27 876.93,27 908.43,27 939.92,27 971.42,27 1002.91,27 1034.41,27 1065.91,27 1097.4,27 1128.9,27 1160.39,27 1191.89,27 1223.39,27 1254.88,27 1286.38,27 1317.87,27 1349.37,27 1380.87,27 1412.36,27 1443.86,27 1475.35,27 1506.85,27 1538.35,27 1569.84,27 1601.34,27 1632.83,27 1664.33,27 1695.83,27 1727.32,27 1758.82,27 1790.32,27 1821.81,27 1853.31,27 1884.8,27 1916.3,27 1947.8,27 1979.29,27 2010.79,27 2042.28,27 2073.78,27 2105.28,27 2136.77,27 2168.27,27 2199.76,27 2231.26,27 2262.76,27 2294.25,27 2325.75,27 2357.24,27 2388.74,27 2420.24,27 2451.73,27 2483.23,27 2514.72,27 2546.22,27 2577.72,27 2609.21,27 2640.71,27 2672.2,27 2703.7,27 2735.2,27 2766.69,27 2892.68,27 2575.67,530.27 2648.33,530.27 2612,555 2574.67,591.06 2648.33,591.06 2031.41,613.3 2188.72,613.3 2611.5,615.49 1932,640 2031.41,645.65 2188.72,645.65 1991,649 2574.67,651.84 2648.33,651.84 1608.94,668 1740,668 1674.47,669 2611.5,675.98 2031.41,678 2188.72,678 1995.77,689.89 1641.7,693.8 1707.23,696.89 1608.94,719.61 1641.7,745.41 1608.94,771.21 2918.49,777.44 2991.16,777.44 1641.7,795.65 2954.83,802.17 2918.49,833.01 2991.16,833.01 2583.16,847.67 2638.73,847.67 2954.83,857.15 2559.02,884 2614,884 1906.32,973.21 1922.99,1003.31 717.08,1024.78 1899.76,1029.01 1775.18,1053.23 733,1079 733,1129 2354.06,1139.89 2385,1166 720,1195 2354.06,1194.89 2385,1221 74,1231 124,1231 473.96,1243.76 2354.06,1249.89 511.17,1271.38 472.96,1301.76 1656.97,1334.49 1711.97,1334.49 560.93,1348.76 601.85,1350.36 1630.86,1365.43 1685.86,1365.43 1740.86,1365.43 774,1388 742,1413 774,1438 742,1463 774,1488 742,1512 1502,1555 677,1558 1471.06,1583.89 677,1608 1502,1610 1471.06,1638.89 677,1658 1502,1665 677,1708 487.08,1828.64 537.08,1828.64 587.08,1828.64 637.08,1828.64 316,1960.67 347.5,1960.67 378.99,1960.67 410.49,1960.67 441.98,1960.67 473.48,1960.67 504.98,1960.67 536.47,1960.67 567.97,1960.67 599.46,1960.67 630.96,1960.67 662.46,1960.67 693.95,1960.67 725.45,1960.67 756.95,1960.67 788.44,1960.67 819.94,1960.67 851.43,1960.67 882.93,1960.67 914.43,1960.67 945.92,1960.67 977.42,1960.67 1008.91,1960.67 1040.41,1960.67 1071.91,1960.67 1103.4,1960.67 1134.9,1960.67 1166.39,1960.67 1197.89,1960.67 1229.39,1960.67 1260.88,1960.67 1292.38,1960.67 1323.87,1960.67 1355.37,1960.67 1386.87,1960.67 1418.36,1960.67 1449.86,1960.67 1481.35,1960.67 1512.85,1960.67 1544.35,1960.67 1575.84,1960.67 1607.34,1960.67 1638.83,1960.67 1670.33,1960.67 1701.83,1960.67 1733.32,1960.67 1764.82,1960.67 1796.32,1960.67 1827.81,1960.67 1859.31,1960.67 1890.8,1960.67 1922.3,1960.67 1953.8,1960.67 1985.29,1960.67 2016.79,1960.67 2048.28,1960.67 2079.78,1960.67 2111.28,1960.67 2142.77,1960.67 2174.27,1960.67 2205.76,1960.67 2237.26,1960.67 2268.76,1960.67 2300.25,1960.67 2331.75,1960.67 2363.24,1960.67 2394.74,1960.67 2426.24,1960.67 2457.73,1960.67 2489.23,1960.67 2520.72,1960.67 2552.22,1960.67 2583.72,1960.67 2615.21,1960.67 2646.71,1960.67 2678.2,1960.67 2709.7,1960.67 2741.2,1960.67 2772.69,1960.67 2804.19,1960.67 2835.69,1960.67 2867.18,1960.67 2898.68,1960.67
  other v2: 567.85,1452.36 635.85,1452.36
NetC5_1: C5.1 R4.1 U4.7 | length 143.1
  Top Layer w10: U4.7 2129.68,756.93 cw(c2158.07,756.93) 2138,777 2158.29,797.29 ccw(c2156.59,799) C5.1 R4.1
NetC11_1: C11.1 R16.2 | length 59.9
  Top Layer w20: R16.2 1756.5,1166.51 1756.5,1225 C11.1
NetD1_1: D1.1 L1.2 U1.1 | length 468.4
  Top Layer w15: L1.2 443,1388.13 443.33,1387.8 559.29,1387.8 U1.1@563.6,1392.11 ; U1.1@563.6,1392.11 U1.1 ; U1.1@563.6,1392.11 U1.1 ; U1.1@563.6,1392.11 U1.1 ; U1.1@563.6,1392.11 U1.1 ; U1.1@563.6,1392.11 U1.1 ; U1.1@563.6,1392.11 U1.1
  Top Layer w27.56: D1.1 386.69,1301.43 386.69,1321.17 410.54,1374.35 L1.2@414.45,1375.96 ; L1.2@441.43,1387.07 429.14,1382.01 L1.2@414.45,1375.96 ; L1.2@414.45,1375.96 L1.2@426.62,1388.13 ; L1.2@414.45,1375.96 L1.2@426.62,1388.13 ; L1.2@414.45,1375.96 L1.2@426.62,1388.13 ; L1.2@414.45,1375.96 L1.2@426.62,1388.13 ; L1.2@414.45,1375.96 L1.2@426.62,1388.13 ; L1.2@426.62,1388.13 L1.2 ; L1.2@426.62,1388.13 L1.2 ; L1.2@426.62,1388.13 L1.2 ; L1.2@426.62,1388.13 L1.2 ; L1.2@426.62,1388.13 L1.2
NetJ2_3: J2.3 J4.1 J5.1 J6.1 J7.1 J8.1 J9.1 T5.1 U2.6 | length 2160.7
  Top Layer w25: U2.6 2104.29,1135.71 cw(c2175,1206.42) 2075,1206.42 2075,1293.58 cw(c2175,1293.58) 2104.29,1364.29 2105,1365 cw(c2129.14,1340.86) 2129.14,1375 2154.5,1375 ccw(c2154.5,1399) 2178.5,1399 ; 2178.48,1399.81 2178.48,1709.44 2178.48,1720.47
  Bottom Layer w50: U2.6 2190.71,1049.29 ccw(c2261.42,1120) 2261.42,1020 J2.3@3093.91,1020 ; J9.1 3098.38,1453 3098.38,1025.77 3104.15,1020 J2.3@3093.91,1020 ; J2.3@3113.58,1011.85 ccw(c3093.91,992.18) J2.3@3093.91,1020
NetJ3_A5: J3.A5 R11.1 | length 266.3
  Top Layer w10: J3.A5 289.18,1492.53 cw(c289.18,1487.86) v2(293.85,1487.86) ; R11.1 386,1661.99 v1(386,1626)
  Bottom Layer w10: v2@295.67,1489.69 v2(293.85,1487.86) cw(c354.17,1487.86) 311.51,1530.51 371.15,1590.15 ccw(c335.3,1626) 384.04,1612.04 ccw(c335.3,1626) v1(386,1626)
NetJ3_B5: J3.B5 R10.1 | length 642.1
  Top Layer w10: R10.1 443.03,1667.14 483.38,1667.14 v1(484.52,1668.28)
  Bottom Layer w10: J3.B5@168.69,1431.56 ccw(c170.75,1469.68) J3.B5 159.29,1442.96 cw(c230,1513.67) 130,1513.67 130,1603.99 cw(c220.69,1603.99) 156.54,1668.09 cw(c211.81,1612.88) 211.81,1691 ; 211.85,1691 429.68,1691 cw(c429.68,1613.43) v1(484.52,1668.28)
NetJ4_2: J4.2 R6.2 | length 70.9
  Top Layer w25: R6.2 2068.01,1427 2137.51,1427
NetJ5_2: J5.2 R12.2 | length 83.2
  Top Layer w20: R12.2 R12.2@2067.56,1496.7 ; 2145.75,1496.49 2145.75,1497.2 J5.2@2147.93,1497.2
  Top Layer w25: R12.2 2067.01,1496.49 2145.75,1496.49
NetJ6_2: J6.2 R13.2 | length 81.4
  Top Layer w20: 2145.32,1709.33 2145.32,1709.44 J6.2@2147.93,1709.44
  Top Layer w25: R13.2 2067.01,1709.33 2145.32,1709.33
NetJ7_2: J7.2 R14.2 | length 83.7
  Top Layer w20: R14.2 R14.2@2067.96,1567.45 ; 2144.06,1567.81 2144.06,1567.95 J7.2@2147.93,1567.95
  Top Layer w25: R14.2 2067.01,1567.81 2144.06,1567.81
NetJ8_2: J8.2 R15.2 | length 86.3
  Top Layer w15: R15.2 R15.2@2069.46,1638.2
  Top Layer w20: R15.2@2067.01,1635.75 cw(c2074.13,1628.63) R15.2@2074.13,1638.7 ; 2142.07,1639.25 2142.07,1638.7 J8.2@2147.93,1638.7
  Top Layer w25: R15.2@2074.13,1638.7 2074.13,1639.25 2142.07,1639.25
NetJ10_1: J10.1 R17.2 | length 77
  Top Layer w25: 1677.99,1428 R17.2
NetJ11_1: J11.1 R18.2 | length 77
  Top Layer w25: 1677.99,1499 R18.2
NetJ12_1: J12.1 R19.2 | length 77
  Top Layer w25: 1677.99,1570 R19.2
NetJ13_1: J13.1 R20.2 | length 77
  Top Layer w25: 1677.99,1641 R20.2
NetJ14_1: J14.1 R21.2 | length 77
  Top Layer w25: 1677.99,1712 R21.2
NetJ15_1: J15.1 R7.2 R17.1 R18.1 R19.1 R20.1 R21.1 | length 423.5
  Top Layer w20: R18.1@1818.5,1499 1818.5,1428.5 R17.1 R7.2 ; R18.1 R19.1 R20.1 R21.1 1827.71,1714.12 1862,1714.12 J15.1@1900,1716
NetR1_2: R1.2 R3.1 U4.6 | length 223.2
  Top Layer w10: U4.6 cw(c2149.37,675.79) 2159.61,727.68 cw(c2149.37,675.79) 2186.74,713.21 2204.96,694.99 ccw(c2226.78,716.82) 2226.78,685.95 ; R3.1@2226.78,642.52 2226.78,685.95 ; R1.2 ccw(c2246.06,642.01) 2246.06,685.95 2226.78,685.95
NetR6_1: R6.1 R7.1 R12.1 R13.1 R14.1 R15.1 U2.2 | length 671.8
  Top Layer w20: U2.2 1869.58,1203 ; R7.1 1941,1428.28 R6.1@2002.99,1428.28 ; R6.1 R6.1@2002.99,1428.28 ; R13.1 R15.1 R14.1 R12.1 R6.1@2002.99,1428.28
  Top Layer w25: 1869.58,1203 ccw(c1869.58,1303) 1940.29,1232.29 1973.7,1265.7 ccw(c1902.99,1336.41) 2002.99,1336.41 R6.1
NetR8_1: R8.1 R9.2 U1.3 | length 182.8
  Top Layer w10: R8.1 629.5,1225.5 629.5,1301.5 R9.2 641.68,1314.68 641.68,1397.54 U1.3
PG: LED1.A R2.2 U4.4 | length 1164.8
  Top Layer w10: U4.4 2129.68,532.35 ccw(c2165.98,532.35) 2130.59,524.29 ccw(c2165.98,532.35) 2135.77,512.23 2136.45,511.55 ccw(c2173.99,549.09) 2142.05,506.69 ccw(c2173.99,549.09) R2.2 ccw(c2219.84,496) R2.2@2174,495.43 ; 2187.42,463.58 2188,463
  Top Layer w20: R2.2@2174,495.43 ccw(c2219.84,496) 2187.42,463.58 ; 2188,463 ccw(c2219.38,494.38) 2219.38,450 3181.93,450 3188.33,443.6 3193.65,443.6 LED1.A
PRI_16V: D2.1 J1.1 T7.1 | length 595.6
  Top Layer w40: J1.1@192,772.68 690.24,772.68 cw(c690.24,747.92) 715,747.92 D2.1@715,689.49
VUSB: C7.1 C10.1 J3.A4 J3.A9 J3.B4 J3.B9 L1.1 T2.1 U1.4 U1.5 | length 1127.9
  Top Layer w10: J3.B4 199.37,1414.69 245.04,1414.69 J3.A9 322,1413.79 ; J3.B9 199.37,1511.31 245.04,1511.31 J3.A4 245.99,1512.17 282,1512.17 ; 282.05,1512.21 337,1512.21 337,1511 437.89,1511 L1.1 ; L1.1@444,1514.11 463.68,1514.11 520.57,1571 C7.1 ; U1.5 563.6,1495.99 570.41,1489.18 631.59,1489.18 638.4,1495.99 U1.4
  Top Layer w15: C10.1 561.5,1653.94 C7.1 563.6,1571 U1.5
  Bottom Layer w10: v1(524,1502) cw(c526.41,1499.59) 526.41,1503 622.58,1503 ccw(c622.58,1603) 693.29,1532.29 793.47,1632.47 cw(c837.65,1588.27) 818.02,1647.6 cw(c837.65,1588.27) T2.1
VZ_RAW: J2.1 R5.2 R16.1 T6.1 U2.3 U3.1 | length 2363.6
  Top Layer w30: R5.2 1269,917.1 cw(c1292.9,917.1) 1276,934 1282.08,940.08 ccw(c1229.16,993) 1304,993 1304,1074.62 ccw(c1259.62,1074.62) U3.1 U3.1@1291,1095.31 ; R16.1 1756.5,1102.5 1836.5,1102.5 U2.3
  Bottom Layer w50: U3.1 1834,1106 U2.3 1846.58,1103 cw(c1846.58,1003) 1856.84,1102.47 cw(c1846.58,1003) 1917.29,1073.71 2167.71,823.29 ccw(c2238.42,894) 2238.42,794 2573.48,794 cw(c2573.48,694) 2644.19,764.71 2790.75,618.15 J2.1@3113.58,618.15
pads on no net: C1.0 C2.0 C3.0 C4.0 C5.0 C6.0 C7.0 C8.0 C9.0 C10.0 C11.0 DRL1.0 DRL1.D2m7 DRL2.0 DRL2.D2m7 DRL3.0 DRL3.D2m7 DRL4. J3.1 J3.A2 J3.A3 J3.A6 J3.A7 J3.A8 J3.A10 J3.A11 J3.B2 J3.B3 J3.B6 J3.B7 J3.B8 J3.B10 J3.B11 LED1.0 R1.0 R2.0 R3.0 R4.0 R5.0 R6.0 R7.0 R8.0 R9.0 R10.0 R11.0 R12.0 R13.0 R14.0 R15.0 R16.0 R17.0 R18.0 R19.0 R20.0 R21.0 U1.0 U2.1 U2.5 U2.8
copper on no net: | length 2582.4
  Top Layer w3.71: 1216.16,1625.07 1246.34,1625.07 1246.34,1625.35 ; 1318.28,1625.36 1360.49,1625.36
  Top Layer w9.88: 1310.97,1624.9 ccw(c1271.09,1624.9) 1310.97,1624.9
  Top Layer w12: 2595,1612 2701,1612 2701,1724 2595,1724 2595,1612
  Layer 1 w12: 2594.36,1499.6 2594.36,1611.6 2700.36,1611.6 2700.36,1499.6 2594.36,1499.6
  Layer 2 w12: 2594.36,1387.6 2594.36,1499.6 2700.36,1499.6 2700.36,1387.6 2594.36,1387.6
  Bottom Layer w5.91: 1304.43,247.29 1371.7,247.29 ; 1486.36,247.28 1486.36,246.83 1534.45,246.83
  Bottom Layer w12: 2593.91,1273.63 2699.91,1273.63 2699.91,1385.63 2593.91,1385.63 2593.91,1273.63
  Bottom Layer w15.75: 1510.48,246.56 ccw(c1446.92,246.56) 1510.48,246.56

## Polygon pours and split planes (outlines as drawn)
GND on Top Layer "Top Layer-GND 1" (solid, pour order 22): 1438,1489 1507,1445 1549,1403 1566,1390 1587,1364 1613,1324 1634,1285 1642,1277 1803,1277 1808,1282 1808,1377 1802,1383 1679.91,1383 1653.95,1408.95 1655,1410 1655,1743.37 3185,1743.37 3185,1988.37 48,1988.37 48,1743.37 1438,1743.37
GND on Top Layer "NONET_L01_P-001" (solid, pour order 19): 157,1187.72 157,1180 286,1180 286,1188.8 328,1188.8 328,1403 247.16,1403 247.16,1578.83 343,1578.83 343,1753 0,1753 0,1187.72
VUSB on Top Layer "NONET_L01_P-001" (solid, pour order 18): 629,1590 590,1590 590,1470.87 541.01,1470.87 361,1470.87 361,1403 226.94,1403 226.94,1578.83 342.31,1578.83 342.31,1694 629,1694
16V on Top Layer "NONET_L01_P-001" (solid, pour order 9): 1161,302 1161,269 2138,269 2138,526 2045,526 2045,548.96 1935,548.96 1935,617 1091,617 1091,700 1087,700 1019.5,736 940,797.5 895.73,844.79 cw(c1091.07,996.04) 873.61,878.79 830,971 823.12,996 580,996 580,1190.16 287,1188.8 287,1139 157,1139 157,1188.19 0,1187.46 0,302
15V on Top Layer "NONET_L01_P-001" (solid, pour order 8): 1676,940 2116,940 2116,758 1988,758 1891,855 1676,855
GND on Top Layer "NONET_L01_P-001" (solid, pour order 1): 659,1333 659,1188 631,1188 631,1000 794,1000 794,1764 633,1764 633,1606 599,1606 599,1464.7 530,1464.7 530,1357 522,1349 428,1349 428,1197 589,1197 589,1333
GND on Top Layer "Top Layer-GND" (solid, pour order 23): 1592,620 1767,620 1767,622 1935,622 1935,595 2201,595 2201,684 2195,690 2060,690 2035,715 1767,715 1767,850 1592,850
GND on Top Layer "NONET_L01_P-001" (solid, pour order 11): 2276,1300 2276,1068 2417,1068 2417,1300
GND on Top Layer "NONET_L01_P-001" (solid, pour order 16): 1761,940 1983,940 1983,1070 1761,1070
GND on Top Layer "NONET_L01_P-001" (solid, pour order 6): 2529.54,466.7 2685.88,466.7 2685.88,698.7 3258.88,698.7 3258.88,920 2530.8,920
GND on Top Layer "NONET_L01_P-001" (solid, pour order 20): 2850,269 2850,54 ccw(c2904,54) 2904,0 3185.16,0 3184,112 3234,112 ccw(c3234,130) 3252,130 3252,270 2851,270
GND on Top Layer "NONET_L01_P-001" (solid, pour order 13): 48,119 ccw(c31,119) 31,136 27,136 cw(c27,163) 0,163 0,268 2800,268 2800,50 cw(c2749,50) 2749,-1 164,-1 163,0 54.83,0 cw(c54.83,6.83) 48,6.83
no net on Top Overlay "NONET_L01_P-001" (solid): 1871,226 1871,620 1477,620 1477,226
no net on Top Solder "NONET_L01_P-001" (solid): 3184,1986.68 3184,1891.32 48,1891.32 48,1986.68
no net on Top Solder "NONET_L01_P-001" (solid, pour order 14): 48,0 48,100.57 3186,100.57 3186,0
no net on Bottom Solder "NONET_L01_P-001" (solid): 3015,1987 3015,1857 195,1857 195,1987
no net on Bottom Solder "NONET_L01_P-001" (solid): 201,2 201,132 3021,132 3021,2
GND on Layer 1 "NONET_L01_P-001" (solid, pour order 3): 3184,112 3236,112 ccw(c3236,128) 3252,128 3252,1755 ccw(c3209,1755) 3209,1798 cw(c3209,1823) 3184,1823 3184,1988 183,1988 46,1988 46,1862 cw(c43,1862) 43,1859 21,1859 ccw(c21,1839) 1,1839 1,160 ccw(c26,160) 26,135 30,135 cw(c30,117) 48,117 48,0 2747,0 ccw(c2747.01,54) 2801,54 2801,356.07 ccw(c2772.66,356.08) 2772.66,384.41 2368.21,384.41 cw(c2368.21,399.07) 2353.56,399.07 2353.56,413 cw(c2366,413) 2366.01,425.45 3010.28,425.45 cw(c3010.28,410.86) 3024.87,410.86 3024.87,395.12 cw(c3013.23,395.12) 3013.23,383.48 2875.38,383.47 ccw(c2875.38,357.67) 2849.57,357.67 2849.57,53.02 ccw(c2902.84,53.26) 2903.08,0 3184,0
15V on Layer 2 "NONET_L01_P-001" (solid, pour order 5): 3185,112 3234,112 ccw(c3234,130) 3252,130 3252,1755 ccw(c3209,1755) 3209,1798 3208,1798 cw(c3208,1821) 3185,1821 3185,1982.83 ccw(c3176.14,1977.81) 3176.14,1988 46.75,1988 48.22,1870 cw(c38.11,1870.11) 38,1860 19,1860 ccw(c19,1841) 0,1841 0,162 ccw(c27,162) 27,135 32,135 cw(c32,118) 49,118 49,2 2750.3,2 ccw(c2750.3,53.03) 2801.34,53.03 2801.34,355.01 ccw(c2771.8,355.01) 2771.8,384.55 2368.45,384.55 cw(c2368.45,397.79) 2355.21,397.79 2355.21,410.01 cw(c2369.98,410.01) 2369.98,424.78 3010.53,424.78 cw(c3010.53,409.5) 3025.81,409.5 3025.81,401.36 cw(c3006.46,401.36) 3006.46,382 2877.62,382 ccw(c2877.62,353.99) 2849.61,353.99 2849.61,45.92 ccw(c2894.23,46.62) 2894.94,2 3184.4,2 ccw(c3184.4,2.7) 3185,3.05
GND on Bottom Layer "NONET_L01_P-001" (solid, pour order 2): 3186,109 3190,113 3237,113 ccw(c3237,127) 3251,127 3251,1757 ccw(c3210,1757) 3210,1798 3209,1798 cw(c3209,1822) 3185,1822 3185,1902 cw(c3186,1902) 3186,1903 3101,1988 48,1988 48,1863 cw(c44,1863) 44,1859 18,1859 ccw(c18,1840) -1,1840 -1,162 ccw(c26,162) 26,135 34,135 cw(c34,121) 48,121 48,1 2749.7,1 ccw(c2749.7,52.03) 2800.73,52.03 2800.73,357.57 ccw(c2772.21,357.57) 2772.21,386.09 2370.36,386.09 cw(c2370.36,402.38) 2354.07,402.38 2354.07,409 cw(c2372.4,409) 2372.4,427.34 3005.87,427.34 cw(c3005.87,406.46) 3026.75,406.46 3026.75,399.84 cw(c3008.93,399.84) 3008.93,382.02 2868.89,382.02 ccw(c2868.89,360.12) 2847,360.12 2847,60 ccw(c2906,60) 2906,1 3183,1 3186,4

## Keep-outs
Keep-Out Layer:
  lines w5.91: 2562.32,1064.41 cw(c2561.91,1064.41) 2561.91,1064 2558.41,1064 ccw(c2558.41,1082.64) 2577.05,1082.64 2577.05,1178.66 2577.05,1720.76 ccw(c2565.15,1720.76) 2565.15,1732.66 2548.71,1732.66 ccw(c2548.71,1719.01) 2535.05,1719.01 2535.05,1180.59 2535.05,1081.19 ccw(c2551.83,1081.19) 2551.83,1064.41 2563.51,1064.41 ; 0,161 ccw(c25,161) 25,136 29,136 cw(c29,117) 48,117 48,0 2750,0 ccw(c2750,50) 2800,50 2800,93 2800,356 ccw(c2773,356) 2773,383 2368.66,383 cw(c2368.66,396.66) 2355,396.66 2355,413.1 cw(c2366.9,413.1) 2366.9,425 3009.93,425 cw(c3009.93,410) 3024.93,410 3024.93,399.93 cw(c3008,399.93) 3008,383 2876,383 ccw(c2876,356) 2849,356 2849,93 2849,50 ccw(c2899,50) 2899,0 3059.23,0 3178.99,0 3211.7,0 3194,102 3194,112 3221,112 3236,112 ccw(c3236,128) 3252,128 3252,1754 ccw(c3208,1754) 3208,1798 cw(c3208,1820.2) 3185.8,1820.2 3185.8,1842 3185.8,1988.19 3059.67,1988.19 48,1988.19 48,1868.63 cw(c38.37,1868.63) 38.37,1859 20,1859 ccw(c20,1839) 0,1839 0,161 ; 454,282.66 ccw(c467.66,282.66) 467.66,269 1196.07,269 ccw(c1196.07,285.93) 1213,285.93 1213,296 ccw(c1198,296) 1198,311 465.9,311 ccw(c465.9,299.1) 454,299.1 454,282.66
  lines w10: 942.19,1204.59 942.19,1204.59 ; 1537.12,999.6 cw(c1556.53,999.6) 1556.53,1019 1639.21,1019 cw(c1639.21,998.93) 1659.28,998.93 cw(c1241,1106) 1660.23,1209.3 cw(c1641.93,1209.3) 1641.93,1191 1556,1191 cw(c1556,1208.94) 1538.06,1208.94 1538.06,1209.77 ccw(c1241,1106) 1537.12,999.6

## Other copper
Top Layer:
  region: 306 vertices and 5 holes, not listed, extent 1214.51,1574.75 1363.83,1673.93
  region: 227 vertices and 1 holes, not listed, extent 1233.04,1587.43 1292.1,1663.2
  region: 1294.33,1653.17 1296.55,1653.17 1296.55,1652.06 1292.1,1652.06 1292.1,1653.17 1293.21,1653.17 1293.21,1654.29 1294.33,1654.29
  region: 1299.9,1647.6 1299.9,1646.49 1298.78,1646.49 1298.78,1647.6 1298.78,1648.72 1299.9,1648.72
  region: 1301.01,1644.26 1303.24,1644.26 1303.24,1643.14 1303.24,1642.03 1301.01,1642.03 1301.01,1643.14 1301.01,1644.26 1299.9,1644.26 1299.9,1645.37 1301.01,1645.37
  region: 1296.55,1598.57 1296.55,1597.46 1292.1,1597.46 1292.1,1598.57 1295.44,1598.57 1295.44,1599.69 1296.55,1599.69
  text "1" at 2627.05,1629.35 h120
Layer 1:
  pour cut-out: 2586,1735 2586,1263 2710,1263 2710,1735
  text "2" at 2619.95,1517 h120
Layer 2:
  pour cut-out: 2585,1735 2585,1263 2708,1263 2708,1736 2588,1736
  text "3" at 2619.99,1405.7 h120
Bottom Layer:
  pour cut-out: 2754,0 ccw(c2754,45) 2799,45 2799,131 cw(c2801,131) 2801,133 2849,133 2849,48.23 ccw(c2896.65,48.23) 2896.65,0.58 2757,0.58
  pour cut-out: 1332.95,157.96 1357.05,149.04 1376.05,143.04 1404.39,137.12 1462.05,138.04 1513.92,159.19 1609.05,242.04 1611.05,251.04 1589.55,272.54 1557.05,301.04 1513.02,335 1462.05,356.04 1394.55,355.54 1329.47,333.26 1311.95,324.04 1215.05,267.04 1185.05,246.04
  region: 1406.33,204.6 1406.33,202.82 1413.43,202.82 1413.43,204.6 1408.1,204.6 1408.1,206.38 1406.33,206.38
  region: 1399.22,277.41 1395.67,277.41 1395.67,275.64 1395.67,273.86 1399.22,273.86 1399.22,275.64 1399.22,277.41 1401,277.41 1401,279.19 1399.22,279.19
  region: 1401,282.74 1401,280.96 1402.78,280.96 1402.78,282.74 1402.78,284.52 1401,284.52
  region: 1409.88,291.62 1406.33,291.62 1406.33,289.84 1413.43,289.84 1413.43,291.62 1411.66,291.62 1411.66,293.4 1409.88,293.4
  region: 227 vertices and 1 holes, not listed, extent 1413.43,186.84 1507.56,307.6
  region: 306 vertices and 5 holes, not listed, extent 1299.11,166.64 1537.08,324.7
  pour cut-out: 2586,1736 2711,1736 2711,1263 2586,1263
  text "4" at 2618.38,1291.19 h120

## Silkscreen, mask and mechanical layers (free items; w line width, h text height)
Top Overlay:
  lines w3.94: -81.69,410.47 -23,410.47 -23,863.23 -81.69,863.23 ; -28,1272 -28,1652 ; -28,1462 -44,1462 -44,636.85 -23,636.85 ; 3095.38,1456 3306,1456 3306,850.3 3288,850.3 ; 3288,527.6 3288,1173
  lines w5.91: 2237,553 2294,518
  text "VUSB" at 725.09,1546.22 h90
  text "15V" at 2727,1390.53 h90
  text "10V" at 2721,1190 h137.8
  text "GND" at 72.78,1087.88 h90 r90
  text "10V" at 2346,884.53 h90
  text "VIN" at 756.81,769.16 h90
  text "Vz" at 2373.78,663.16 h90
  text "Vz" at 2707,433 h125
  text "16V" at 1169,364.53 h90
  text "PG" at 3104,302 h59.06 r90
Top Solder:
  drawing of 10 lines, arcs and shapes, not listed
  text "TEN399 3V1 5224" at 667,1792 h137
  text "+10.000000V" at 2175,1777 h137.8
  text "16-20V" at 33,904 h118.11
  text "www.CircuitValley.com" at 334,158 h106.3
Bottom Solder:
  drawing of 6 lines, arcs and shapes, not listed
  text "www.CircuitValley.Com" at 2779,283 h118.11
  text "TEN399 3V0 5224" at 2774,159 h137